# Altium PCB Digital Clock.PcbDoc
Units mm, origin at the board's own origin, x right, y up, seen from the top; angles counter-clockwise.
Board outline 68 x 54 mm, 2 copper layers (Top Layer, Bottom Layer); 35 components, 32 nets, 142 pads, 4 vias.
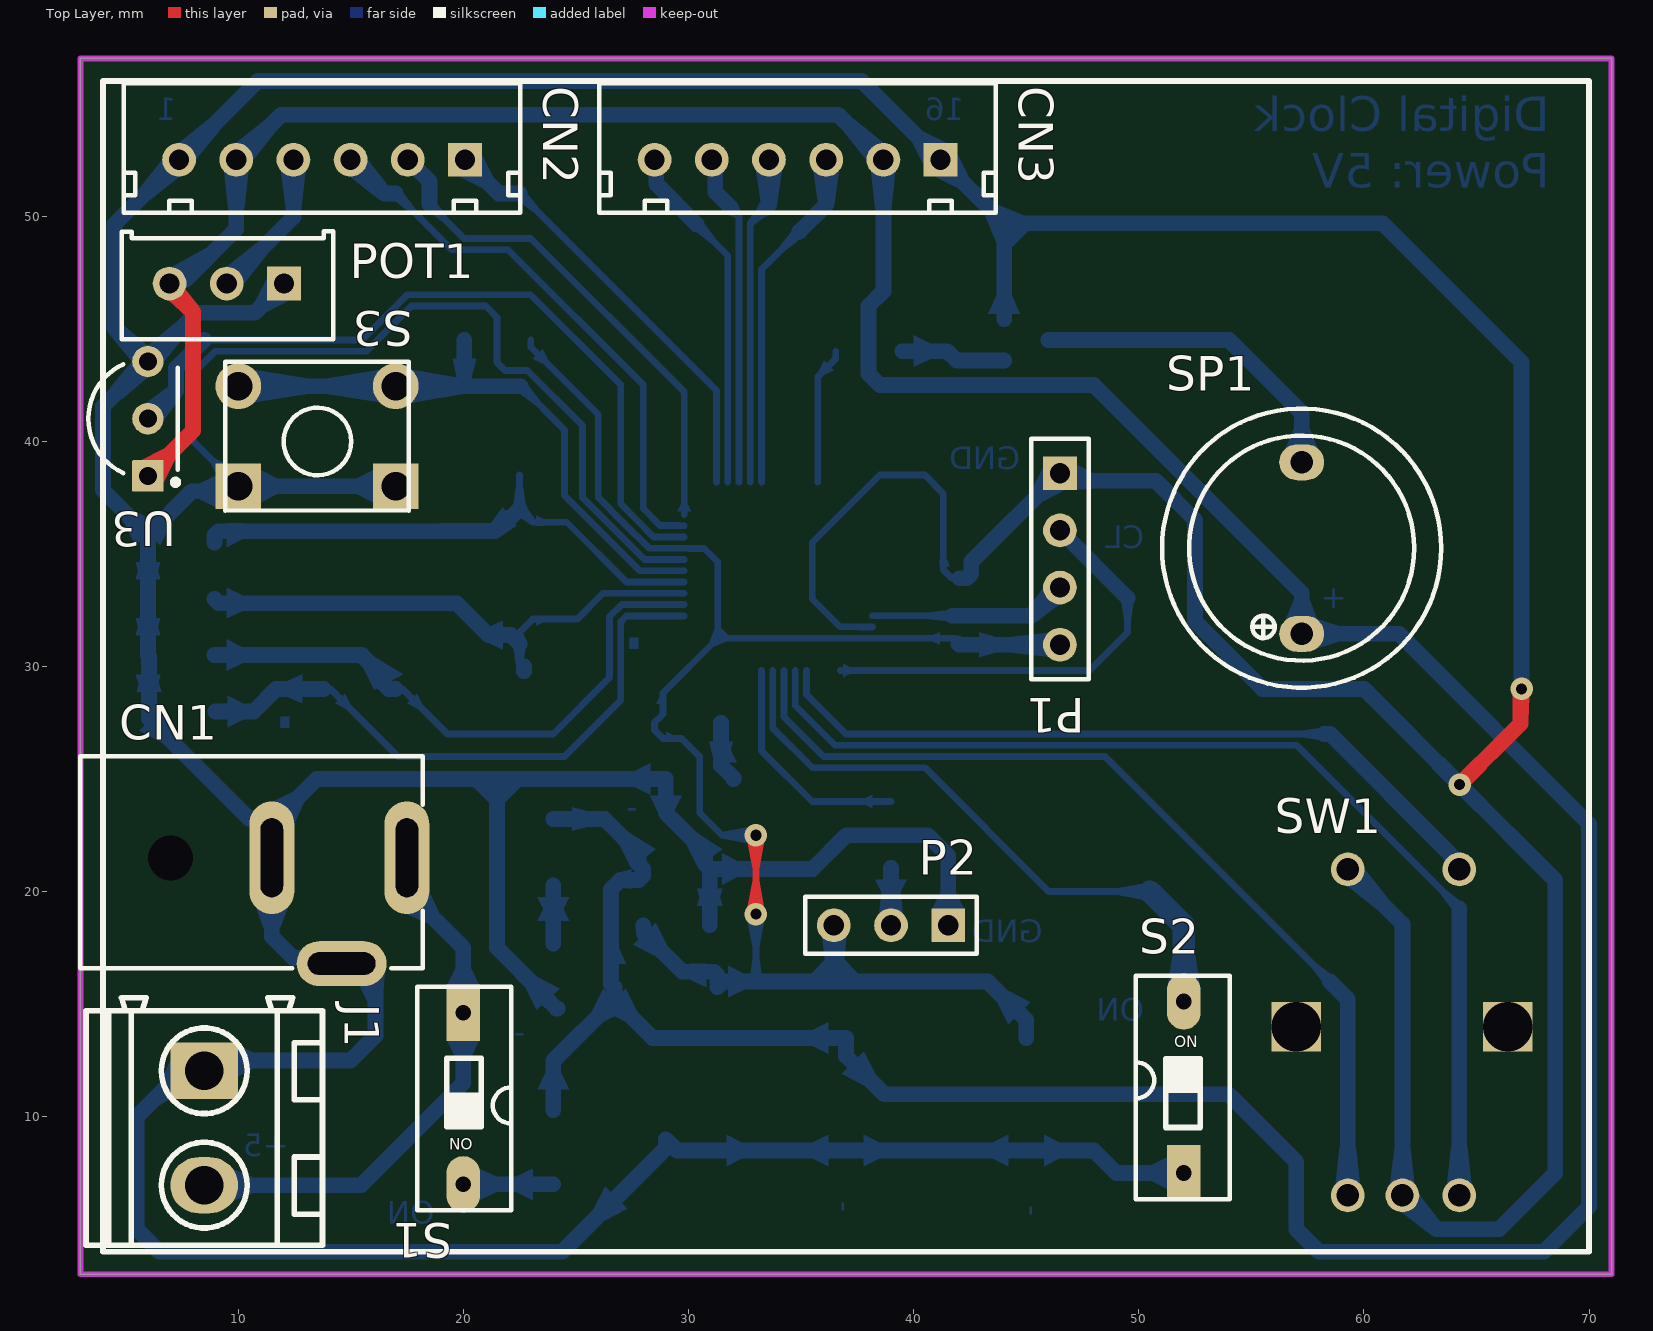
[diagram p0: Top Layer view]
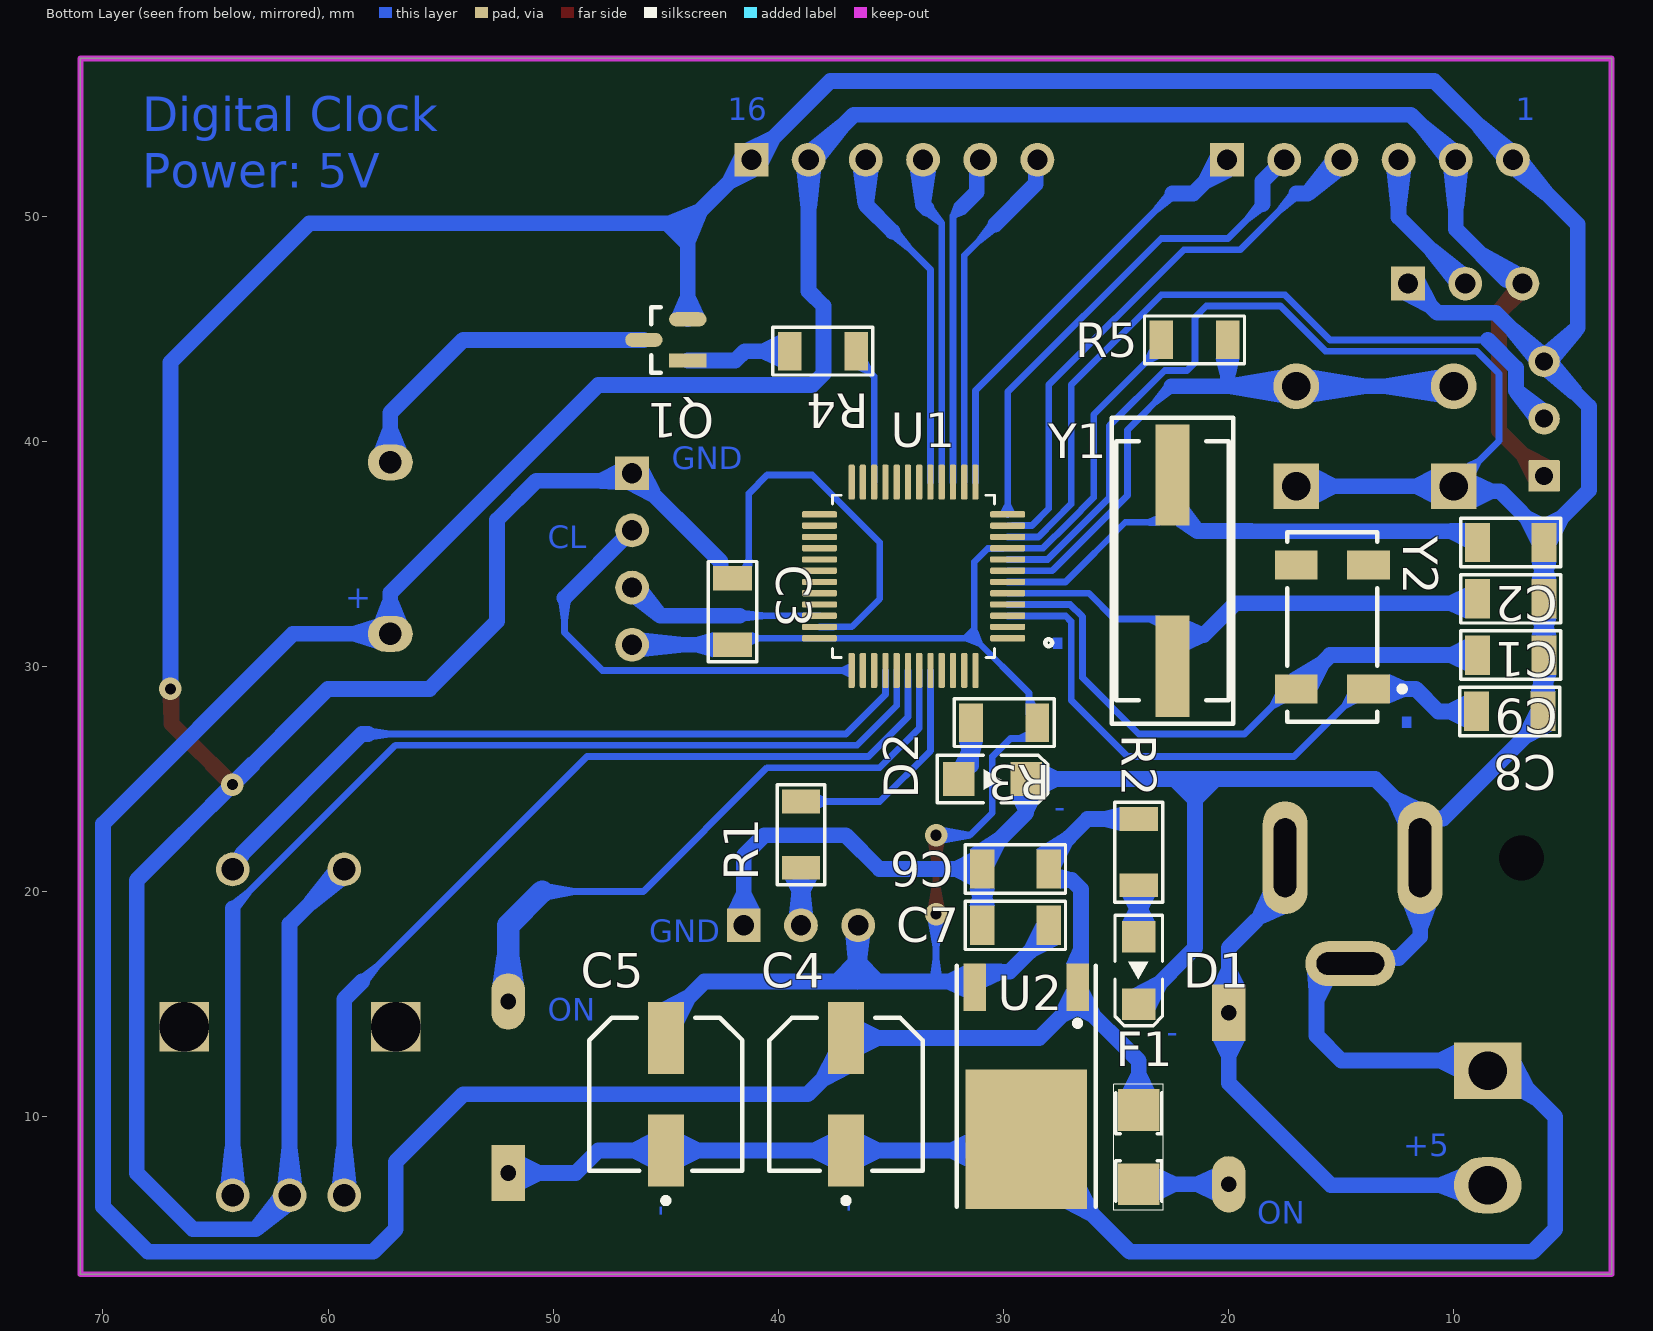
[diagram p1: Bottom Layer view, seen from below]

## Layer stack, top to bottom
Top Solder: solder mask 0.0102, Solder Resist, Dk 3.5
Top Layer: signal copper 0.0356
Dielectric 1: dielectric 0.32, FR-4, Dk 4.8
Bottom Layer: signal copper 0.0356
Bottom Solder: solder mask 0.0102, Solder Resist, Dk 3.5

## Board outline
3,3 3,57 71,57 71,3

## Design rules (kind name [scope] priority, off if disabled: settings)
Clearance [All] p1: gap=0.2 ignorepadtopadclearanceinfootprint=FALSE
PolygonConnect [All] p1: connectstyle=Relief reliefconductorwidth=0.254 reliefentries=4 polygonreliefangle="90 Angle" airgapwidth=0.254
RoutingVias [All] p1: holewidth=0.711 width=1.27 viastyle="Through Hole" minholewidth=0.711 minwidth=1.27 maxholewidth=0.711 maxwidth=1.27
SolderMaskExpansion [All] p1: expansion=0.102 istentingtop=FALSE
SupplyNets "Schematic Supply Nets_5" [InNet('GND')] p1: voltage=0.000
SupplyNets "Schematic Supply Nets_2" [InNet('+5')] p2: voltage=0.000
SupplyNets "Schematic Supply Nets_3" [InNet('VCC')] p3: voltage=0.000
SupplyNets "Schematic Supply Nets_1" [InNet('+3.3')] p4: voltage=0.000
UnRoutedNet [All] p1: checkbadconnections=TRUE
Width [All] p1: maxlimit=1 minlimit=0.3 preferedwidth=0.7
29 further rules are at their usual default settings.

## Components (designator, comment, footprint, x,y, rotation, side; value= is the part's Value field where it differs from the comment)
C1 "22pF" CAP1206#1 3.179,35.24 r0 bottom
C2 "22pF" CAP1206#1 3.179,37.74 r0 bottom
C3 "100nF" CAP1206#1 44.28,36.731 r270 bottom
C4 "100uF 16V" "CAP ELECT SMD" 37,11 r90 bottom
C5 "2.2uF 16V" "CAP ELECT SMD" 45,11 r90 bottom
C6 "100nF" CAP1206#2 33.771,18.76 r180 bottom
C7 "100nF" CAP1206#1 33.771,16.26 r180 bottom
C8 "100pF" CAP1206#1 3.229,30.24 r0 bottom
C9 "100pF" CAP1206#1 3.179,32.74 r0 bottom
CN1 "Power Jack" "Power Jack" 17.5,21.5 r90 top
CN2 "Hrader X6H" "Header H6B-XHA" 13.73,52.5 r0 top
CN3 "Hrader X6H" "Header H6B-XHA" 34.85,52.5 r0 top
D1 "LED_RED_1206" "LED 1206" 22.217,19.652 r90 bottom
D2 "LED_BLUE_1206" "LED 1206" 33.652,26.783 r0 bottom
F1 "F=0.3A" "Fuse 1206" 23.095,11.538 r90 bottom
J1 "Phoenix 2 way" "Terminal Block 2Pin" 8.5,9.5 r270 top
P1 "Female-Header 4" "Header 4 female" 26.18,66.901 r270 top
P2 "Header 3" "Header 3 Male" 59.447,35.391 r180 top
POT1 "10k" "POT MULTITURN" 39.345,56.652 r180 top
Q1 "BJT SOT23 SMD" "BJT SOT23 SMD" 45,44.5 r0 bottom
R1 "100K" RES1206 37.024,18.104 r90 bottom
R2 "220R" RES1206 25.976,26.171 r270 bottom
R3 "220R" RES1206 25.554,29.476 r0 bottom
R4 "10K" RES1206 33.604,45.976 r0 bottom
R5 "10k" RES1206 25.946,42.524 r180 bottom
S1 "DIP Switch x1" "DIP Switch x1" 72.959,31.511 r180 top
S2 "DIP Switch x1" "DIP Switch x1" -0.959,-9.391 r0 top
S3 "Push Button Switch DIP" "Push Button Switch DIP" 86.286,93.066 r180 top
SP1 "BUZZER" "BUZZER 7.62 mm DC" 58,35 r90 top
SW1 "Rotary Encoder" "Rotary Encoder" 61.064,13.111 r0 top
U1 "STM32F103C8T6" STM32F103C8T6 34,34 r0 bottom
U2 "CDT" "Regulator SMD CDT" 20.159,14.789 r0 bottom
U3 "LM35DZ/NOPB" LM35 6,41 r180 top
Y1 "8MHz" "Crystal SMD" 27.049,42.863 r270 bottom
Y2 "ABS25-32.768KHZ-T" "Crystal Clock" 15.4,31.75 r90 bottom

## Footprints (in the part's own frame and the unit in brackets; to place one, negate y for a bottom-side part, rotate by r counter-clockwise, add the part's x,y. Pads: shape width x height; smd on the part's side, far side on the other; paste and mask are expansions set on the pad)
"BJT SOT23 SMD" [mm]
  rect 1.659x0.627 smd paste+0 mask+0: 1(-0.977,0.915)
  rrect100% 1.659x0.627 smd paste+0 mask+0: 2(-0.977,-0.915) 3(0.977,0)
  silkscreen extent 0.23,-1.45 0.65,1.45, body extent -1.2,-1.45 1.2,1.45, height 1.1
"BUZZER 7.62 mm DC" [mm]
  oval 1.6x2 hole 1: 1(-3.556,0.762) 2(4.064,0.762)
  silkscreen extent -5.94,-5.44 6.45,6.96, body extent -5.75,-5.23 6.25,6.76, height 9.5
CAP1206#1 [mm]
  rect 1.1x1.75 smd: 1(2.821,2.24) 2(5.771,2.24)
  silkscreen extent 2.07,1.17 6.52,3.31, body extent 2.65,1.39 5.95,3.09, height 0.94
CAP1206#2 [mm]
  rect 1.1x1.75 smd: 2(5.771,2.24) l(2.821,2.24)
  silkscreen extent 2.07,1.17 6.52,3.31, body extent 2.65,1.39 5.95,3.09, height 0.94
"CAP ELECT SMD" [mm]
  rect 3.2x1.6 smd paste+0 mask+0: 1(-2.5,0) 2(2.5,0)
  silkscreen extent -4.85,-3.4 3.4,3.4, body extent -3.9,-3.3 3.9,3.3, height 6.1
"Crystal Clock" [mm]
  rect 1.3x1.9 smd paste+0 mask+0: 1(-2.75,-1.6) 2(2.75,-1.6) 3(2.75,1.6) 4(-2.75,1.6)
  silkscreen extent -4.2,-3.22 4.2,2, body extent -4,-2 4,2, height 2.76
"Crystal SMD" [mm]
  rect 4.5x1.5 smd: 1(4.363,4.549) 2(12.863,4.549)
  silkscreen extent 1.81,1.85 15.41,7.25, body extent 2.4,2.3 14.7,6.8, height 5.18
"DIP Switch x1" [mm]
  rect 1.5x2.5 hole 0.7: 1(52.959,16.891)
  oval 1.5x2.5 hole 0.7: 2(52.959,24.511)
  silkscreen extent 50.83,15.74 54.99,25.65, body extent 50.99,15.75 54.99,25.65, height 6.8
"Fuse 1206" [mm]
  rect 1.85x1.85 smd: 1(-4.538,0.905) 2(-1.238,0.905)
  silkscreen extent -5.69,-0.2 -0.09,2, body extent -4.49,0.11 -1.29,1.71, height 1
"Header 3 Male" [mm]
  rect 1.5x1.5 hole 0.9: 1(17.907,16.891)
  round 1.5 hole 0.9: 2(20.447,16.891) 3(22.987,16.891)
  silkscreen extent 16.64,15.62 24.26,18.16, body extent 16.64,15.62 24.26,18.16, height 8.38
"Header 4 female" [mm]
  rect 1.5x1.5 hole 0.9: 1(28.321,20.32)
  round 1.5 hole 0.9: 2(30.861,20.32) 3(33.401,20.32) 4(35.941,20.32)
  silkscreen extent 26.8,19.05 37.46,21.59, body extent 26.8,19.07 37.46,21.57, height 5
"Header H6B-XHA" [mm]
  rect 1.5x1.5 hole 0.9: 1(6.35,0)
  round 1.5 hole 0.9: 2(3.81,0) 3(1.27,0) 4(-1.27,0) 5(-3.81,0) 6(-6.35,0)
  silkscreen extent -8.81,-2.35 8.8,3.4, body extent -9.06,-2.48 9.05,3.53, height 7
"LED 1206" [mm]
  rect 1.4x1.5 smd: 1(-4.652,1.783) 2(-1.652,1.783)
  silkscreen extent -5.61,0.73 -0.7,2.84, body extent -4.75,0.98 -1.55,2.58, height 0.68
LM35 [mm] "TO, Flat Index; 3 In-Line, Formed Axial Leads; Body Dia. 4.8mm; Leads 0.56 x 0.41 mm (max)"
  rrect7% 1.4x1.4 hole 0.8: 1(0,2.54)
  round 1.4 hole 0.8: 2(0,0) 3(0,-2.54)
  silkscreen extent -1.35,-2.41 2.65,2.95, body extent -1.33,-2.83 2.35,2.83, height 9.01
"POT MULTITURN" [mm]
  rect 1.5x1.5 hole 0.9: 1(27.305,9.652)
  round 1.5 hole 0.9: 2(32.385,9.652) 3(29.845,9.652)
  silkscreen extent 25.12,7.33 34.51,12.12, body extent 25.05,7.3 34.58,12.12, height 11.55
"Power Jack" [mm]
  oval 5x2 hole 1 slot 3.5 at 0 deg: 1(0,0) 2(0,6)
  oval 2x4 hole 1 slot 3 at 90 deg: 3(-4.7,2.9)
  round 1.9 hole 2: MH(0,10.5)
  silkscreen extent -4.9,-0.7 4.5,14.5, body extent -4.9,-0.7 4.5,14.5, height 11
"Push Button Switch DIP" [mil]
  rect 80x80 hole 50: 1(2727.81,2167.97) 1(3002.81,2167.97)
  round 80 hole 50: 2(2727.81,1992.97) 2(3002.81,1992.97)
  silkscreen extent 2705,1950 3025,2210, body extent 2710,1959 3022,2203, height 205
"Regulator SMD CDT" [mm]
  rect 1x2.1 smd: 1(6.556,-0.961) 3(11.126,-0.961)
  rect 5.4x6.2 smd: 2(8.841,5.789)
  silkscreen extent 5.76,-1.91 11.93,8.79, body extent 5.57,-1.7 12.11,8.24, height 2.39
RES1206 [mm]
  rect 1.05x1.7 smd: 1(2.946,1.976) 2(5.896,1.976)
  silkscreen extent 2.2,0.92 6.64,3.04, body extent 2.77,1.13 6.07,2.83, height 0.94
"Rotary Encoder" [mm]
  round 1.5 hole 1: 1(3.175,-6.604) 2(0.646,-6.604) 3(-1.778,-6.604) 4(3.175,7.874) 5(-1.778,7.874)
  rect 2.2x2.2 hole 2.2: 6(-4.064,0.889) 6(5.334,0.889)
  body extent -5.21,-6.87 6.49,8.13, height 21.5
STM32F103C8T6 [mm]
  rrect50% 1.56x0.28 smd: 1(-4.18,2.75) 2(-4.18,2.25) 3(-4.18,1.75) 4(-4.18,1.25) 5(-4.18,0.75) 6(-4.18,0.25) 7(-4.18,-0.25) 8(-4.18,-0.75) 9(-4.18,-1.25) 10(-4.18,-1.75) 11(-4.18,-2.25) 12(-4.18,-2.75) 25(4.18,-2.75) 26(4.18,-2.25) 27(4.18,-1.75) 28(4.18,-1.25) 29(4.18,-0.75) 30(4.18,-0.25) 31(4.18,0.25) 32(4.18,0.75) 33(4.18,1.25) 34(4.18,1.75) 35(4.18,2.25) 36(4.18,2.75)
  rrect50% 0.28x1.56 smd: 13(-2.75,-4.18) 14(-2.25,-4.18) 15(-1.75,-4.18) 16(-1.25,-4.18) 17(-0.75,-4.18) 18(-0.25,-4.18) 19(0.25,-4.18) 20(0.75,-4.18) 21(1.25,-4.18) 22(1.75,-4.18) 23(2.25,-4.18) 24(2.75,-4.18) 37(2.75,4.18) 38(2.25,4.18) 39(1.75,4.18) 40(1.25,4.18) 41(0.75,4.18) 42(0.25,4.18) 43(-0.25,4.18) 44(-0.75,4.18) 45(-1.25,4.18) 46(-1.75,4.18) 47(-2.25,4.18) 48(-2.75,4.18)
  silkscreen extent -6.15,-3.6 3.6,3.6, body extent -4.5,-4.5 4.5,4.5, height 1.6
"Terminal Block 2Pin" [mm]
  rect 2.5x3 hole 1.7: 1(-2.54,0)
  oval 2.5x3 hole 1.7: 2(2.54,0)
  silkscreen extent -5.79,-5.25 5.21,5.25, body extent -5.67,-5.25 5.09,5.25, height 14.85

## Part data
C1 C2 C3 C6 C7 C8 C9: library part CAP1206, "CAP1206"
C4 C5: library part "CAP elect SMD", "CAP ALUM 100UF 20% 16V SMD", Capacitance=100uF, Case/Package=Radial, Dielectric Material=Aluminium, ESR (Equivalent Series Resistance)=360mR, Leakage Current=16uA, Max Operating Temperature=105°C, Min Operating Temperature=-55°C, Package Quantity=1000, Ratings=AEC-Q200, Ripple Current=240mA, Tolerance=20%, Voltage=16V, Construction=Cylindrical, Contact Plating=Tin, Diameter=6.3mm, Height=5.8mm, Height - Seated (Max)=0.24inch, Impedance=360mR, Lead Free="Lead Free", Lead Length=2.6mm, Lead Pitch=1.8mm, Length=5.8mm, Life (Hours)=2000Hour, Mount="Surface Mount", Number of Pins=2, Packaging="Tape and Reel", Polarity=Polar, Radiation Hardening=No, Reach SVHC Compliant=Yes, Ripple Current (AC)=240mA, RoHS Compliant=Yes, Series=FK, Termination=SMD/SMT, Voltage Rating=16V, Voltage Rating (DC)=16V, Width=6.6mm
CN2 CN3: library part "Header H6B-XHA"
D1 D2: library part LED_SMD_1206
F1: library part "SMD Fuses 1206", "SMD Fuses 1206"
P1: library part "Header 4 Female"
P2: library part "Header 3 Male"
POT1: library part "POT MULTITURN"
Q1: "TRANS NPN 40V 0.6A SMD SOT23-3", Case/Package=SOT-23, Collector Base Voltage (VCBO)=75V, Collector Emitter Breakdown Voltage=40V, Collector Emitter Saturation Voltage=1V, Continuous Collector Current=600mA, Current=1A, Emitter Base Voltage (VEBO)=6V, Frequency=300MHz, Max Operating Temperature=150°C, Max Power Dissipation=300mW, Min Operating Temperature=-55°C, Package Quantity=3000, Power Dissipation=350mW, Collector Emitter Voltage (VCEO)=40V, Contact Plating=Tin, Current Rating=600mA, Element Configuration=Single, Gain Bandwidth Product=300MHz, Height=1mm, hFE Min=100, Lead Free="Lead Free", Length=3.05mm, Max Breakdown Voltage=40V, Max Collector Current=600mA, Max Frequency=300MHz, Mount="Surface Mount", Number of Elements=1, Number of Pins=3, Packaging="Tape and Reel", Polarity=NPN, Radiation Hardening=No, REACH SVHC="No SVHC", Termination=SMD/SMT, Transition Frequency=300MHz, Voltage=40V, Voltage Rating (DC)=40V, Weight=0.000282oz, Width=1.4mm
R1 R2 R3 R4 R5: library part RES1206, "RES1206"
SP1: "Buzzer 5V active"
U1: "ARM® Cortex®-M3 STM32F1 Microcontroller IC 32-Bit 72MHz 64KB (64K x 8) FLASH 48-LQFP (7x7)", Package="LQFP-48 STMicroelectronics", Check_prices=https://www.snapeda.com/parts/STM32F103C8T6/STMicroelectronics/view-part/?ref=eda, MF=STMicroelectronics, MP=STM32F103C8T6, SnapEDA_Link=https://www.snapeda.com/parts/STM32F103C8T6/STMicroelectronics/view-part/?ref=snap
U2: library part "Regulator SMD"
U3: library part "LM35 DIP", "Precision Centigrade Temperature Sensor, 3-pin TO-92, Pb-Free", Manufacturer="Texas Instruments", PackageTopMarking=NSXYTT*LM35*DZ, PowerWise=N, Code_JEDEC=TO-226-AA, ComponentLink1Description="Datasheet URL", ComponentLink1URL=http://www.ti.com/general/docs/lit/getliterature.tsp?genericPartNumber=LM35&fileType=pdf, CompType="Temp Sensor IC", PackageDescription="TO-92, Molded, 3 Lead", PackageReference=LP0003A, PinCount=3, RoHS=Y
Y1: library part "Crystal SMD", "Crystal SMD"
Y2: library part "Clock Crystal", "CRYSTAL 32.7680KHZ 12.5PF SMD", Case/Package=SMD/SMT, ESR (Equivalent Series Resistance)=50kR, Frequency=32.768kHz, Frequency Tolerance=20ppm, Load Capacitance=12.5pF, Max Operating Temperature=85°C, Min Operating Temperature=-40°C, Operating Frequency="32.768 kHz", Package Quantity=1000, Depth=3.8mm, Height=0.098inch, Lead Free="Lead Free", Length=8mm, Mount="Surface Mount", Number of Pins=4, Packaging="Tape and Reel", Radiation Hardening=No, REACH SVHC="No SVHC", RoHS Compliant=Yes, Series=ABS25, Series Resistance=50kR, Termination=SMD/SMT, Tolerance=20ppm, Width=3.8mm

## Via types
v1: diameter 1, hole 0.5, Top Layer to Bottom Layer, 4 vias

## Nets (pads, with @x,y where several pads share a name; then routed paths per layer and width w, separated by ;. In a path a pad name is that pad's centre, name@x,y a point inside that pad or via, vN(x,y) a via of type N, cw(c..) or ccw(c..) an arc to the next point about the centre after c; other vN are vias at no path point)
+3.3: C3.2 C5.2 C7.2 P1.4 P2.3 R3.1 R5.1 U1.9 U1.36 U2.3 | length 75.6
  Top Layer w0.3: v1(33,19) v1(33,22.5)
  Bottom Layer w0.3: R5.1 23,44.175 26,41.175 26,37.5 27.125,36.375 28.25,35.25 U1.9 30.027,35.25 30.037,35.24 30.704,35.24 31.306,34.638 31.306,31.25 ; 33,16 v1(33,19) ; v1(33,22.5) 31.5,22.5 30.5,23.5 30.5,26 29.7,26.8 28.875,26.8 28.5,27.175 R3.1 28.875,27.875 28.875,28.819 31.306,31.25 ; C3.2@42,31 41.75,31.25 U1.36 31.306,31.25
  Bottom Layer w0.7: C7.2 28,18.378 28.021,18.357 28.021,18.154 29.735,16.44 31.135,16.44 31.285,16.29 U2.3@31.285,16 ; U2.3 31.535,16 33,16 36.5,16 ; P2.3 36.5,18.5 36.5,16 ; C3.2@42,31 C3.2 P1.4 ; C5.2 45,14.3 43.3,16 36.5,16
+5: C4.2 C6.2 CN2.5 CN3.2 F1.2 POT1.2 R2.1 SP1.1 U2.1 U3.1 | length 184.5
  Top Layer w0.7: U3.1 8,40.46 8,45.744 6.96,46.784 POT1.2
  Bottom Layer w0.7: POT1.2 7.113,47.153 7.653,47.153 9.92,49.42 CN2.5 11.92,54.5 36.66,54.5 CN3.2 38.66,46.66 38,46 38,43 38.5,42.5 48,42.5 57.238,33.262 SP1.1 61.556,31.444 70,23 70,6 68,4 58,4 57,5 57,8 54,11 38.7,11 37,12.7 C4.2 28.415,13.5 U2.1@26.715,15.2 ; F1.2 24,12.485 U2.1@26.715,15.2 ; R2.1 26.275,23.225 27.8,21.7 27.8,21.2 C6.2 28,20.715 27.8,20.515 26.975,20.515 26.565,20.105 26.565,15.9 U2.1 U2.1@26.715,15.2
BOOT: P2.2 R1.1 | length 2.5
  Bottom Layer w0.7: P2.2 R1.1
BUZZER: R4.1 U1.22 | length 6.2
  Bottom Layer w0.3: U1.22 35.75,42.875 36.55,43.675 R4.1
D4: CN3.6 U1.14 | length 15.7
  Bottom Layer w0.3: 30.375,49.625 31.75,48.25 U1.14
  Bottom Layer w0.7: CN3.6 28.573,52.427 28.573,51.427 30.375,49.625
D5: CN3.5 U1.15 | length 14.8
  Bottom Layer w0.3: 31.895,50.368 32.25,50.013 U1.15
  Bottom Layer w0.7: CN3.5 31.193,52.347 31.193,51.07 31.895,50.368
D6: CN3.4 U1.16 | length 14.7
  Bottom Layer w0.3: U1.16 32.75,49.67 33.415,50.335
  Bottom Layer w0.7: 33.415,50.335 33.58,50.5 CN3.4
D7: CN3.3 U1.17 | length 15.5
  Bottom Layer w0.3: U1.17 33.25,47.63 34.935,49.315
  Bottom Layer w0.7: 34.935,49.315 36.12,50.5 CN3.3
DATA: SW1.3 U1.42 | length 41
  Bottom Layer w0.3: U1.42 34.25,27.75 36,26 48.5,26 58.5,16
  Bottom Layer w0.7: 58.5,16 59.286,15.214 SW1.3
EN: CN2.1 U1.13 | length 19.5
  Bottom Layer w0.3: 22.5,51 31.25,42.25 U1.13
  Bottom Layer w0.7: CN2.1 21.58,51 22.5,51
GND: C1.1 C2.1 C3.1 C4.1 C5.1 C6.l C7.1 C8.1 C9.1 CN1.2 CN1.3 CN2.6 CN3.1 D1.1 D2.1 J1.1 P1.1 P2.1 POT1.1 Q1.2 S2.1 S3.1 SW1.2 SW1.5 U1.8 U1.35 U2.2 U3.3 | length 406.6
  Top Layer w0.7: v1(64.25,24.75) 66.95,27.45 66.95,28.95 v1(67,29)
  Bottom Layer w0.3: S3.1@10.015,38 8,40.015 8,43 9,44 15.707,44 17.707,46 21,46 21.5,45.5 21.5,43.5 21.855,43.145 22.845,43.145 25.3,40.69 25.3,37.493 26.5,36.293 28.043,34.75 U1.8 ; U1.35 37.56,31.75 37.55,31.76 37.489,31.76 36.74,31.76 35.5,33 35.5,35.5 38.5,38.5 40.5,38.5 41.315,37.685 41.315,34.31 41.715,33.91 C3.1
  Bottom Layer w0.7: POT1.1 10.74,45.7 8.16,45.7 U3.3 ; CN1.3 14.351,17.049 12.451,17.049 11.5,18 CN1.2 CN1.2@11.5,22.648 ; CN1.3@14.748,16.8 16.1,16.8 16.1,13.6 15,12.5 9.96,12.5 9.32,11.86 7.36,11.86 5.5,10 5.5,5 6.5,4 24.4,4 29,8.6 U2.2 29.5,8.5 C4.1 C5.1 48,8.5 49,7.5 S2.1 S2.1@52,7 ; S3.1@16,38 10.015,38 9.789,37.774 7.949,37.774 C2.1@6,35.825 ; D1.1@24.192,14.808 24.142,14.808 23.6,15.35 23.6,15.4 21.5,17.5 21.5,25 ; C7.1 C6.l ; P2.1 41.54,21.59 40.63,22.5 37.015,22.5 35.515,21 C6.l ; C3.1 42.365,33.91 42.565,34.11 42.565,34.645 P1.1 46.832,38.248 50.752,38.248 52.5,36.5 52.5,32 55.5,29 60,29 v1(64.25,24.75) 68.5,20.5 68.5,7.5 66,5 63.217,5 SW1.2 61.71,18.561 SW1.5 ; Q1.2 44.023,49.677 ; v1(67,29) 67,43.5 60.823,49.677 44.023,49.677 ; C2.1@6,35.825 C2.1 C1.1 C9.1 6.05,30.45 C8.1 6.05,27.675 10.476,23.249 10.899,23.249 CN1.2@11.5,22.648 ; C2.1@6,35.825 4,37.825 4,41.54 U3.3 ; U3.3 4.5,45.04 4.5,49.62 CN2.6 10.88,56 37.7,56 CN3.1 44.023,49.677 ; CN1.2@11.5,22.648 11.5,23 13.5,25 21.5,25 ; 21.5,25 D2.1 29,23.5 30.75,21.75 30.75,21.2 C6.l
NetD1_2: D1.2 R2.2 | length 2.6
  Bottom Layer w0.7: D1.2@24,17.692 R2.2
NetD2_2: D2.2 R3.2 | length 2.7
  Bottom Layer w0.7: R3.2 31.45,25.6 32,25.05 D2.2
NetF1_1: F1.1 S1.2 | length 4
  Bottom Layer w0.7: S1.2 F1.1
NetQ1_1: Q1.1 R4.2 | length 4.7
  Bottom Layer w0.7: R4.2 41.5,44 41.915,43.585 Q1.1
NetQ1_3: Q1.3 SP1.2 | length 14.8
  Bottom Layer w0.7: Q1.3 54,44.5 57.238,41.262 SP1.2
NetR1_2: R1.2 U1.44 | length 10.3
  Bottom Layer w0.3: U1.44 33.25,26.25 35.5,24 R1.2
NRST: R5.2 S3.2 U1.7 | length 26.1
  Bottom Layer w0.3: 22.555,42.445 24.5,40.5 24.5,37.586 26,36.086 27.836,34.25 U1.7
  Bottom Layer w0.7: S3.2@10.015,42.445 S3.2@16.055,42.445 ; S3.2@17,42.445 19.945,42.445 ; R5.2 20.05,42.55 19.945,42.445 ; 22.555,42.445 19.945,42.445
RS: CN2.3 U1.11 | length 24.8
  Bottom Layer w0.3: 17,51 19.5,48.5 22,48.5 28,42.5 28,37 28.74,36.26 29.603,36.26 29.613,36.25 U1.11
  Bottom Layer w0.7: CN2.3 16.5,51 17,51
RUN: S2.2 U1.43 | length 27.8
  Bottom Layer w0.3: U1.43 33.75,27.25 35.5,25.5 40.5,25.5 46,20 50.5,20
  Bottom Layer w1: 50.5,20 52,18.5 S2.2
RW: CN2.2 U1.12 | length 22.6
  Bottom Layer w0.3: 18.5,50.54 20.04,49 23,49 29.82,42.18 U1.12
  Bottom Layer w0.7: CN2.2 18.5,51.54 18.5,50.54
SCK: SW1.1 U1.41 | length 47.5
  Bottom Layer w0.3: U1.41 34.75,28.25 36.5,26.5 57,26.5 64.239,19.261
  Bottom Layer w0.7: SW1.1 64.239,19.261
SW: SW1.4 U1.40 | length 33.4
  Bottom Layer w0.3: U1.40 35.25,28.75 37,27 58.224,27
  Bottom Layer w0.7: 58.224,27 58.5,27 63.839,21.661 63.839,21.601 64.239,21.201 SW1.4
SWCL: P1.2 U1.37 | length 19.2
  Bottom Layer w0.3: U1.37 47.82,29.82 49.5,31.5 49.5,33.04
  Bottom Layer w0.7: P1.2 49.5,33.04
SWIO: P1.3 U1.34 | length 8.8
  Bottom Layer w0.3: U1.34 41.715,32.25
  Bottom Layer w0.7: 41.715,32.25 45.25,32.25 P1.3
TEMP: U1.10 U3.2 | length 34.2
  Bottom Layer w0.3: 8.5,44.5 15.5,44.5 17.5,46.5 23,46.5 27,42.5 27,37.207 27.729,36.479 28.457,35.75 U1.10
  Bottom Layer w0.7: U3.2 7.25,42.25 7.25,43.25 8.5,44.5
VCC: CN1.1 J1.2 S1.1 | length 24.5
  Bottom Layer w0.7: J1.2@9.5,6.96 15.46,6.96 20,11.5 S1.1 20,17.5 17.5,20 CN1.1 CN1.1@17.5,22.624
VO: CN2.4 POT1.3 | length 6.7
  Bottom Layer w0.7: POT1.3 12.46,49.96 CN2.4
X1_OSC: C1.2 U1.5 Y1.2 | length 24.1
  Bottom Layer w0.3: Y1.2 22.5,30.99 22.5,31.5 23.1,32.1 25.07,32.1 26.22,33.25 U1.5
  Bottom Layer w0.7: C1.2 9.15,32.8 19.7,32.8 21.11,31.39 22.1,31.39 Y1.2@22.5,30.99 ; Y1.2@22.703,29.797 Y1.2@22.703,30
X1_OSC32: C8.2 U1.3 Y2.1 | length 27.1
  Bottom Layer w0.3: Y2.1 14.1,29 17.1,26 24.5,26 27,28.5 27,32 27.24,32.24 U1.3@29.82,32.24
  Bottom Layer w0.7: C8.2 10.7,28 11.7,29 Y2.1
X2_OSC: C2.2 U1.6 Y1.1 | length 24.5
  Bottom Layer w0.3: Y1.1 22.5,37 23.1,36.4 24.6,36.4 27.25,33.75 U1.6
  Bottom Layer w0.7: C2.2 8.95,35.8 9.15,36 19,36 19.01,36.01 21.403,36.01 21.992,36.6 22.1,36.6 Y1.1@22.5,37
X2_OSC32: C9.2 U1.4 Y2.4 | length 26.5
  Bottom Layer w0.3: Y2.4 17.3,29 19.3,27 24,27 26.5,29.5 26.5,32.207 27.043,32.75 U1.4
  Bottom Layer w0.7: C9.2 15.5,30.5 16.4,29.6 16.4,29.3 16.7,29 Y2.4
pads on no net: CN1.MH SW1.6 U1.1 U1.2 U1.18 U1.19 U1.20 U1.21 U1.23 U1.24 U1.25 U1.26 U1.27 U1.28 U1.29 U1.30 U1.31 U1.32 U1.33 U1.38 U1.39 U1.45 U1.46 U1.47 U1.48 Y2.2 Y2.3

## Keep-outs
Keep-Out Layer:
  the board outline again, w0.254

## Other copper
Bottom Layer:
  text "1" at 7.246,54.254 h1
  text "16" at 42.246,54.254 h1
  text "Digital Clock" at 68.246,53.762 h1.52
  text "Power: 5V" at 68.246,51.254 h1.52
  text "GND" at 44.746,38.754 h1
  text "CL" at 50.246,35.254 h1
  text "+" at 59.246,32.587 h1
  text "." at 28.246,30.754 h3
  text "." at 12.746,27.254 h3
  text "-" at 27.746,23.254 h1
  text "GND" at 45.746,17.754 h1
  text "ON" at 50.246,14.254 h1
  text "-" at 22.746,13.254 h1
  text "+5" at 12.246,8.254 h1
  text "-" at 37.246,6.246 h1 r90
  text "-" at 45.61,6.074 h1 r90
  text "ON" at 18.746,5.254 h1

## Silkscreen, mask and mechanical layers (free items; w line width, h text height)
Top Overlay:
  lines w0.254: 4,4 70,4 70,56 4,56 4,4

## Text inside footprints (layer, text, board x,y; h text height)
S1: Top Overlay "ON" at 20.417,9.043 h0.5 r180
S2: Top Overlay "ON" at 51.583,13.077 h0.5